# EAGLE board Tracksoar v2 shield template (EAGLE 9.0.0)
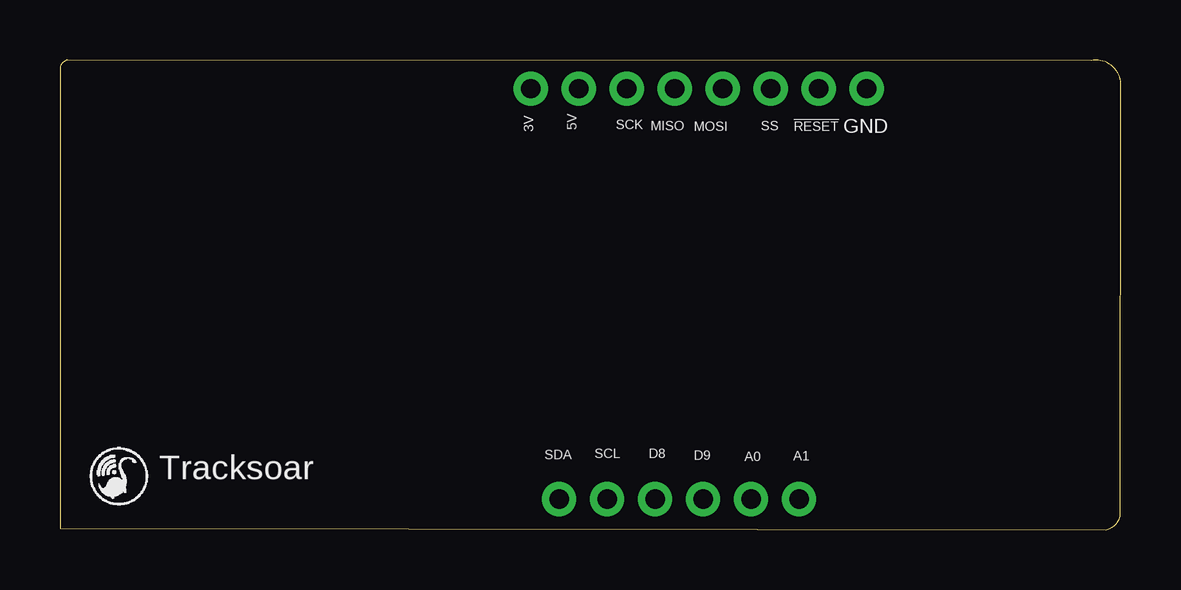
[diagram p0: board, top side]
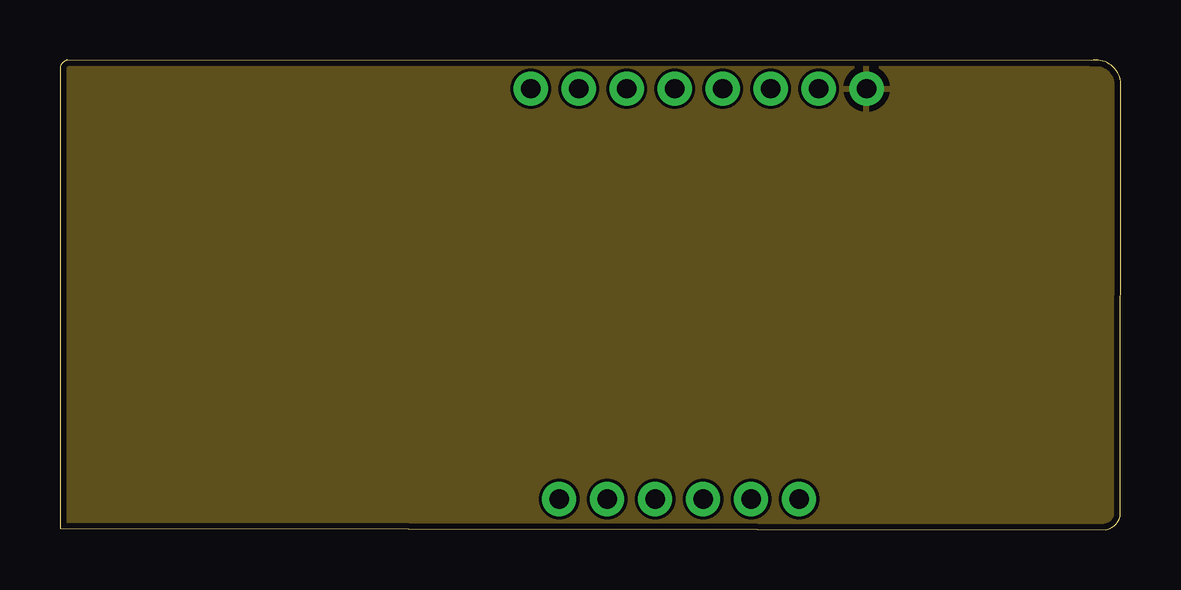
[diagram p1: board, inner layer Route2]
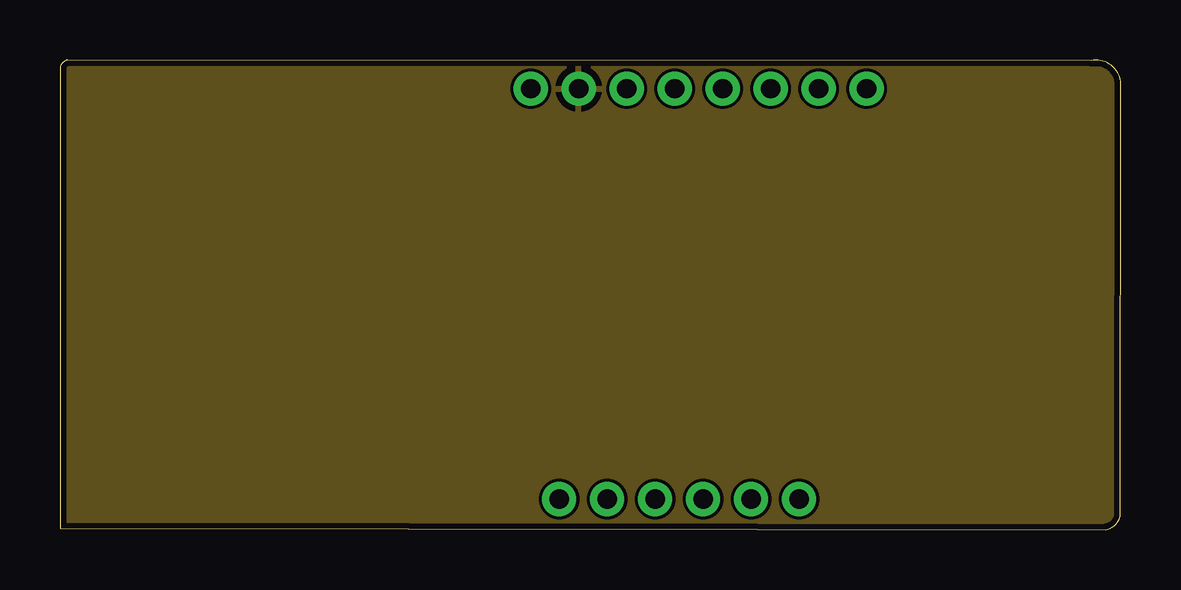
[diagram p2: board, inner layer Route15]
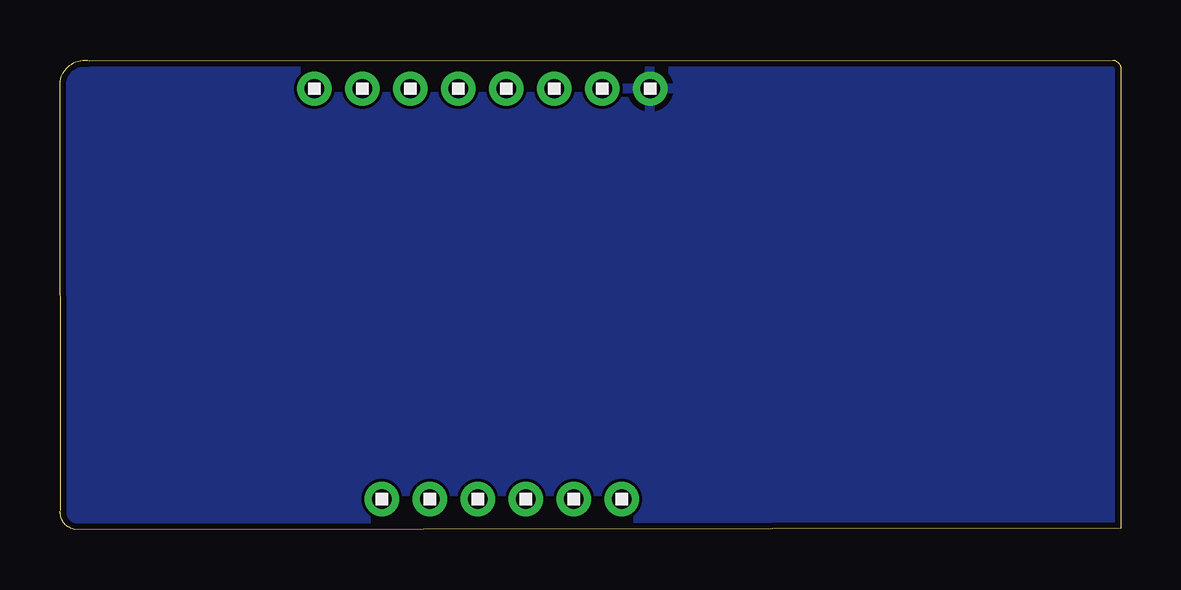
[diagram p3: board, bottom side, seen from below]

Size 44.22 x 19.58 mm. Coordinates in mm from the lower left corner, seen from the top.
Outline: 43.59,0 arc90 44.2,0.81 44.22,18.69 arc90 42.98,19.56 0.33,19.58 arc90 0,19.15 0,0.05 43.59,0
Copper layers (1*2*15*16): Top 0.035mm / dielectric 0.23mm / Route2 0.035mm / dielectric 0.93mm / Route15 0.035mm / dielectric 0.23mm / Bottom 0.035mm
Design rules "MF_Standard_4_Layer": minimum track width 5mil, minimum drill 12mil, track to track 5mil, track to pad 5mil, pad to pad 5mil, via to via 5mil, smd to smd 0mil, copper to edge 10mil, drill to drill 10mil, minimum pad ring 6mil, minimum via ring 6mil, stop-mask expansion 2mil, vias tented up to drill 25mil, thermal gap 10mil

## Footprints (pad centres in the part's own frame; a part is rotated, then mirrored left to right if it is on the bottom)
1X8 = drill 0.8 pad 1.422: 1 -7,0; 2 -5,0; 3 -3,0; 4 -1,0; 5 1,0; 6 3,0; 7 5,0; 8 7,0
1X6 = drill 0.8 pad 1.422: 1 -5,0; 2 -3,0; 3 -1,0; 4 1,0; 5 3,0; 6 5,0

## Placement (x,y rotation side)
FRAME1  FRAME-LETTER  [CREATIVE_COMMONS]  42.19,-8.13 0 top  (outside the outline)
FTDI  1X8  [1X8]  26.62,18.39 180 bottom
U$3  1X6  [1X6]  25.81,1.27 0 bottom

## Library data of the parts
FRAME1 = SparkFun-Aesthetics
FTDI U$3 = headers(2mm)

## Nets
3V: FTDI.1
!RESET: FTDI.7
A0: U$3.2
A1: U$3.1
D8: U$3.4
D9: U$3.3
GND: FTDI.8
MISO: FTDI.4
MOSI: FTDI.5
SCK: FTDI.3
SCL: U$3.5
SDA: U$3.6
SS: FTDI.6
VCC: FTDI.2

## Tracks (layer width: path | path; a pad name or v marks a point on that pad's centre or on a via)
3V
  pour Bottom: 0.05,19.56 44.2,19.56 44.2,-0.15 0.05,-0.15
GND
  pour Route2: 0.1,19.51 44.2,19.51 44.2,0.03 0.1,0.03
VCC
  pour Route15: 0.08,19.61 44.2,19.61 44.2,-0.05 0.08,-0.05

## Text on the board
tNames: 3V | 5V | SCK | MISO | MOSI | SS | !RESET | GND | SDA | SCL | D8 | D9 | A0 | A1 | Tracksoar